# EAGLE board Traffic_Light_Led (EAGLE 9.6.2)
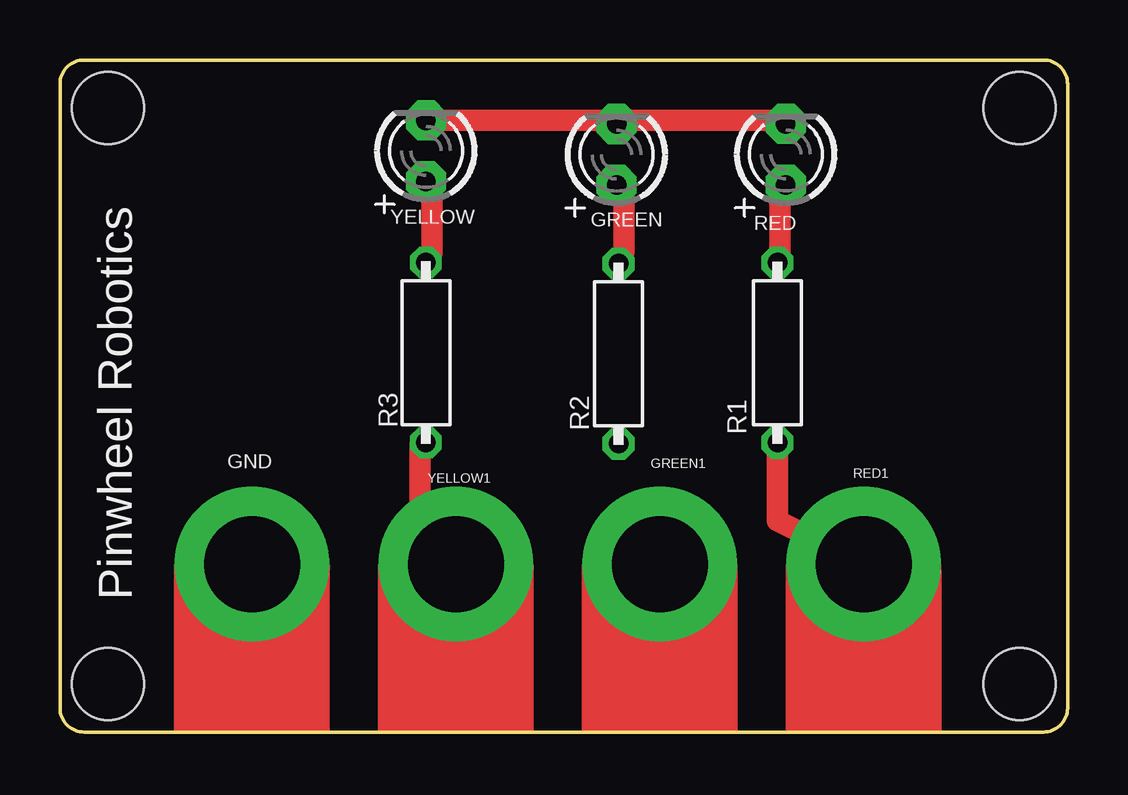
[diagram p0: board, top side]
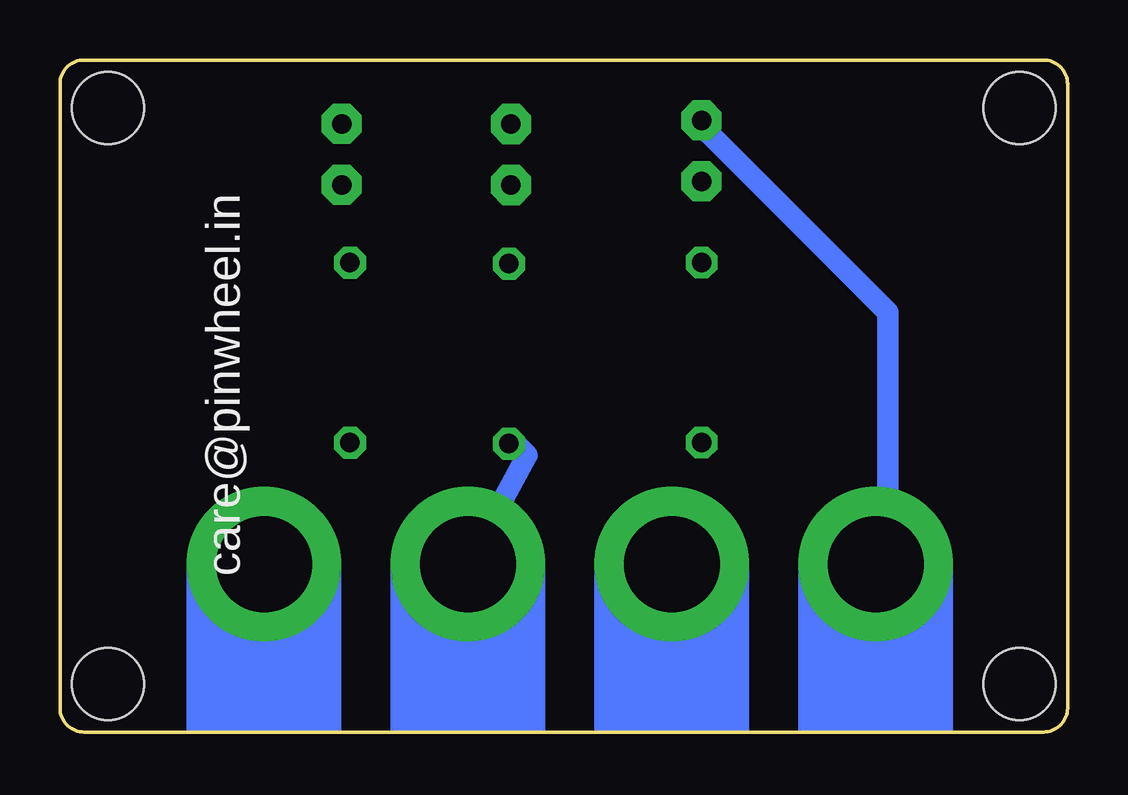
[diagram p1: board, bottom side, seen from below]

Size 42 x 28 mm. Coordinates in mm from the lower left corner, seen from the top.
Outline: 0,27 0,1 arc90 1,0 41,0 arc90 42,1 42,27 arc90 41,28 1,28 arc90 0,27
Copper layers (1*16): Top 0.035mm / dielectric 1.5mm / Bottom 0.035mm
Design rules "default *": minimum track width 35mil, minimum drill 0.35mm, track to track 6mil, track to pad 6mil, pad to pad 6mil, via to via 6mil, smd to smd 6mil, copper to edge 40mil, drill to drill 6mil, minimum pad ring 10mil, minimum via ring 8mil, stop-mask expansion 4mil, vias tented up to drill 0mil, thermal gap 10mil
Holes 3 mm at 2,2 40,2 40,26 2,26

## Footprints (pad centres in the part's own frame; a part is rotated, then mirrored left to right if it is on the bottom)
MICROBIT_PAD = drill 4 pad 6.452: PAD 0,0
LED3MM = drill 0.813 pad 1.676 octagon: A -1.27,0; K 1.27,0
R0207/7 = drill 0.813 octagon: 1 -3.75,0; 2 3.75,0

## Placement (x,y rotation side)
GND  MICROBIT_PAD  [MICROBIT_PAD]  8,7 0 top
GREEN  [LED3MM]  23.2,24.06 90 top
GREEN1  MICROBIT_PAD  [MICROBIT_PAD]  25,7 0 top
R1  330  [R0207/7]  29.91,15.8 90 top
R2  330  [R0207/7]  23.28,15.76 90 top
R3  330  [R0207/7]  15.26,15.81 90 top
RED  [LED3MM]  30.26,24.07 90 top
RED1  MICROBIT_PAD  [MICROBIT_PAD]  33.5,7 0 top
YELLOW  [LED3MM]  15.26,24.22 90 top
YELLOW1  MICROBIT_PAD  [MICROBIT_PAD]  16.5,7 0 top

## Library data of the parts
GND GREEN1 RED1 YELLOW1 = microbit
GREEN RED YELLOW = adafruit
R1-R3 = we-rcl

## Nets
GND: GND.PAD GREEN.K RED.K YELLOW.K
N$1: R1.1 RED1.PAD
N$2: R3.1 YELLOW1.PAD
N$3: GREEN.A R2.2
N$4: GREEN1.PAD R2.1
N$5: R3.2 YELLOW.A
N$6: R1.2 RED.A

## Tracks (layer width: path | path; a pad name or v marks a point on that pad's centre or on a via)
GND
  Top 0.889: RED.K 30,25.5 23.5,25.5 GREEN.K 23,25.5 15.5,25.5 YELLOW.K
  Bottom 0.889: YELLOW.K 15,25 7.5,17.5 7.5,8.85 GND.PAD
N$1
  Top 0.889: RED1.PAD 29.91,8.81 R1.1
N$2
  Top 0.889: R3.1 15,12 15,9.39 YELLOW1.PAD
N$3
  Top 0.889: R2.2 23.5,20 23.5,22.5 GREEN.A
N$4
  Bottom 0.889: R2.1 23,12 22.53,11.53 GREEN1.PAD
N$5
  Top 0.889: R3.2 15.5,20 15.5,22.5 YELLOW.A
N$6
  Top 0.889: R1.2 30,20 30,22.5 RED.A

## Text on the board
tPlace: Pinwheel Robotics
bPlace: care@pinwheel.in